# Altium PCB 声光双控电路.PcbDoc
Units mm, origin at the board's own origin, x right, y up, seen from the top; angles counter-clockwise.
Board outline 152.4 x 101.6 mm, 2 copper layers (Top Layer, Bottom Layer); 20 components, 16 nets, 64 pads, 2 vias.
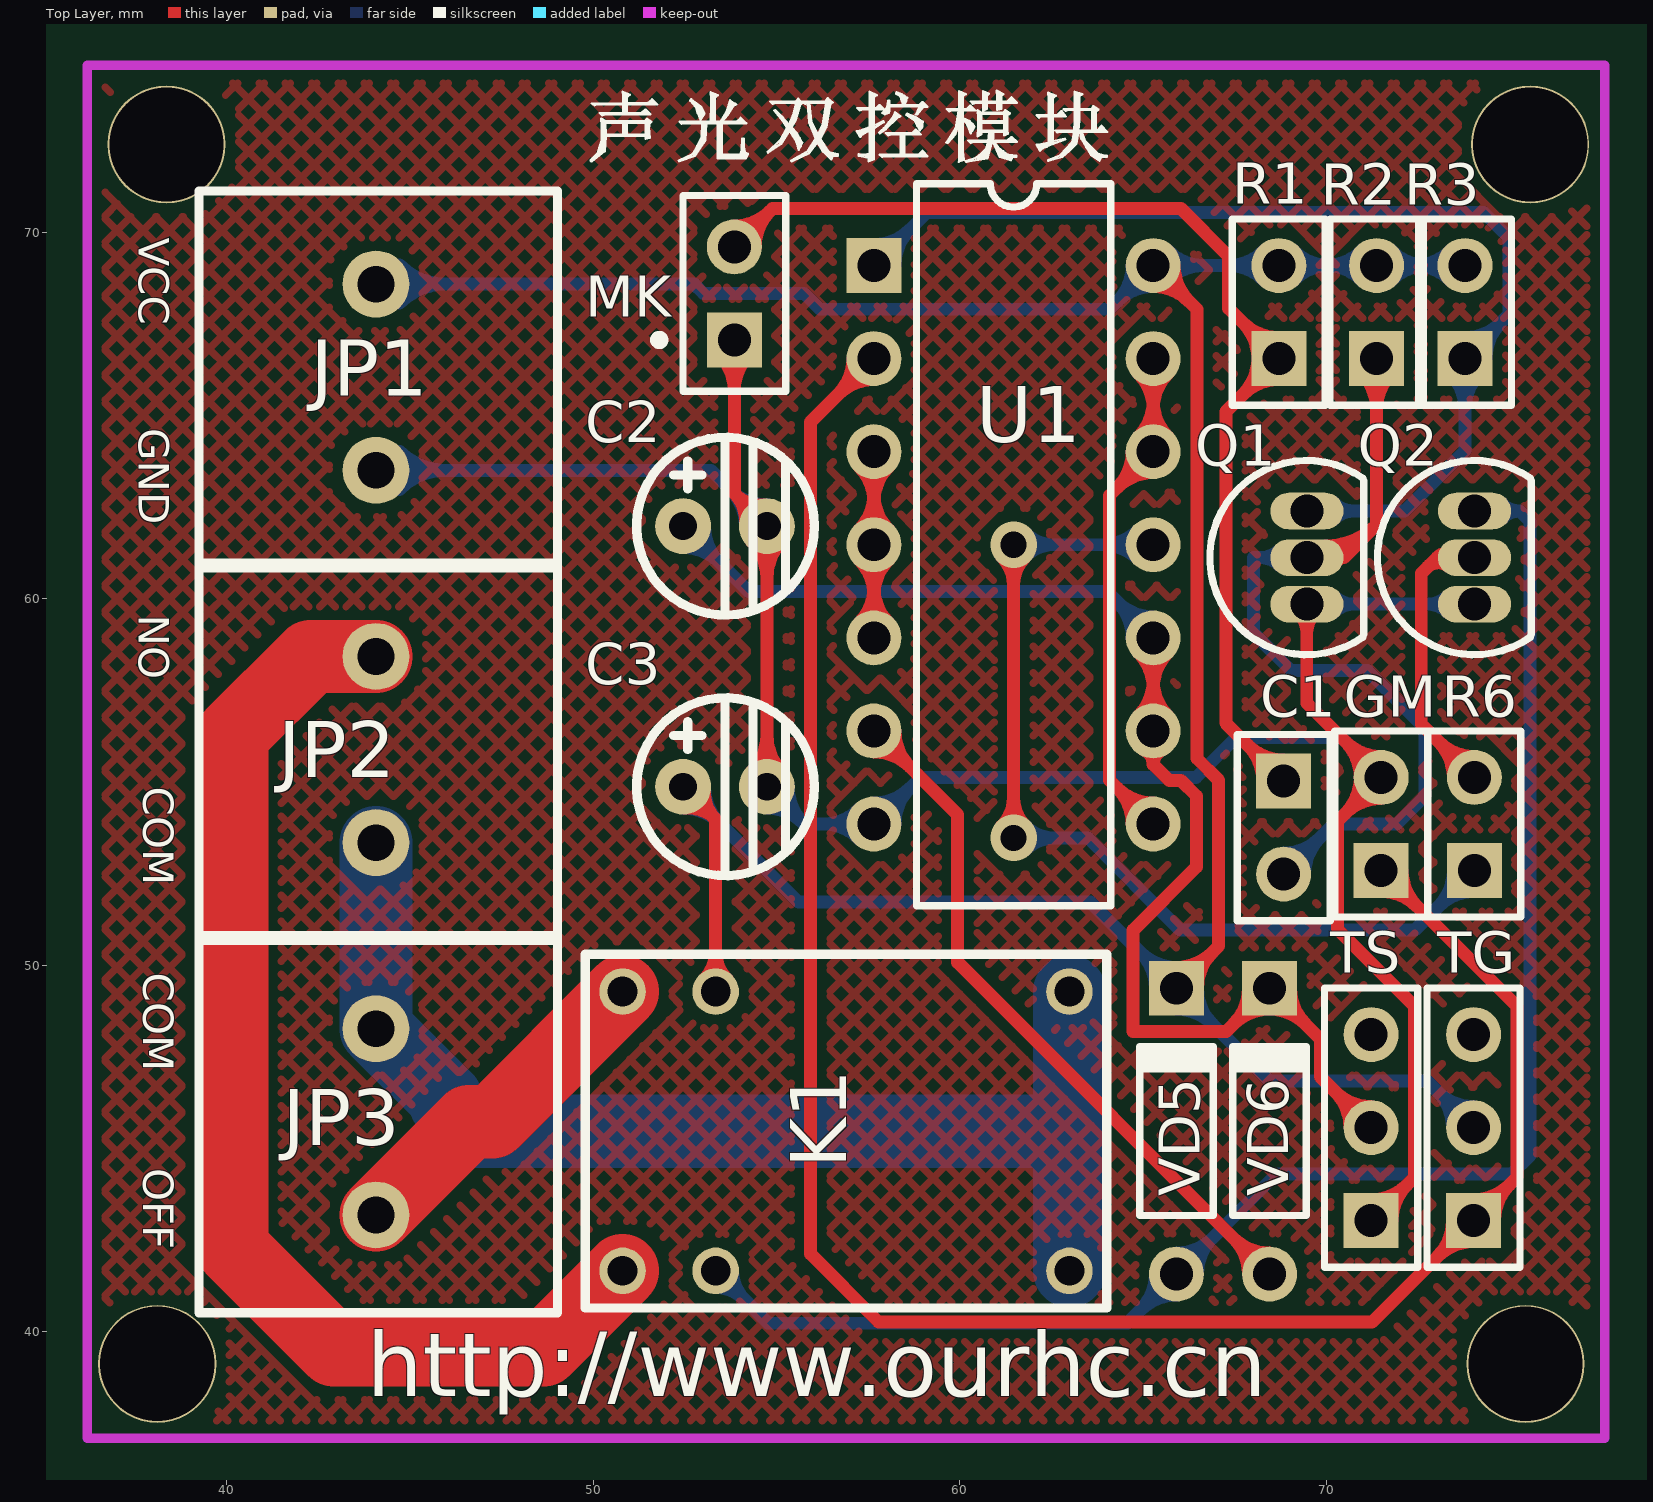
[diagram p0: Top Layer view]
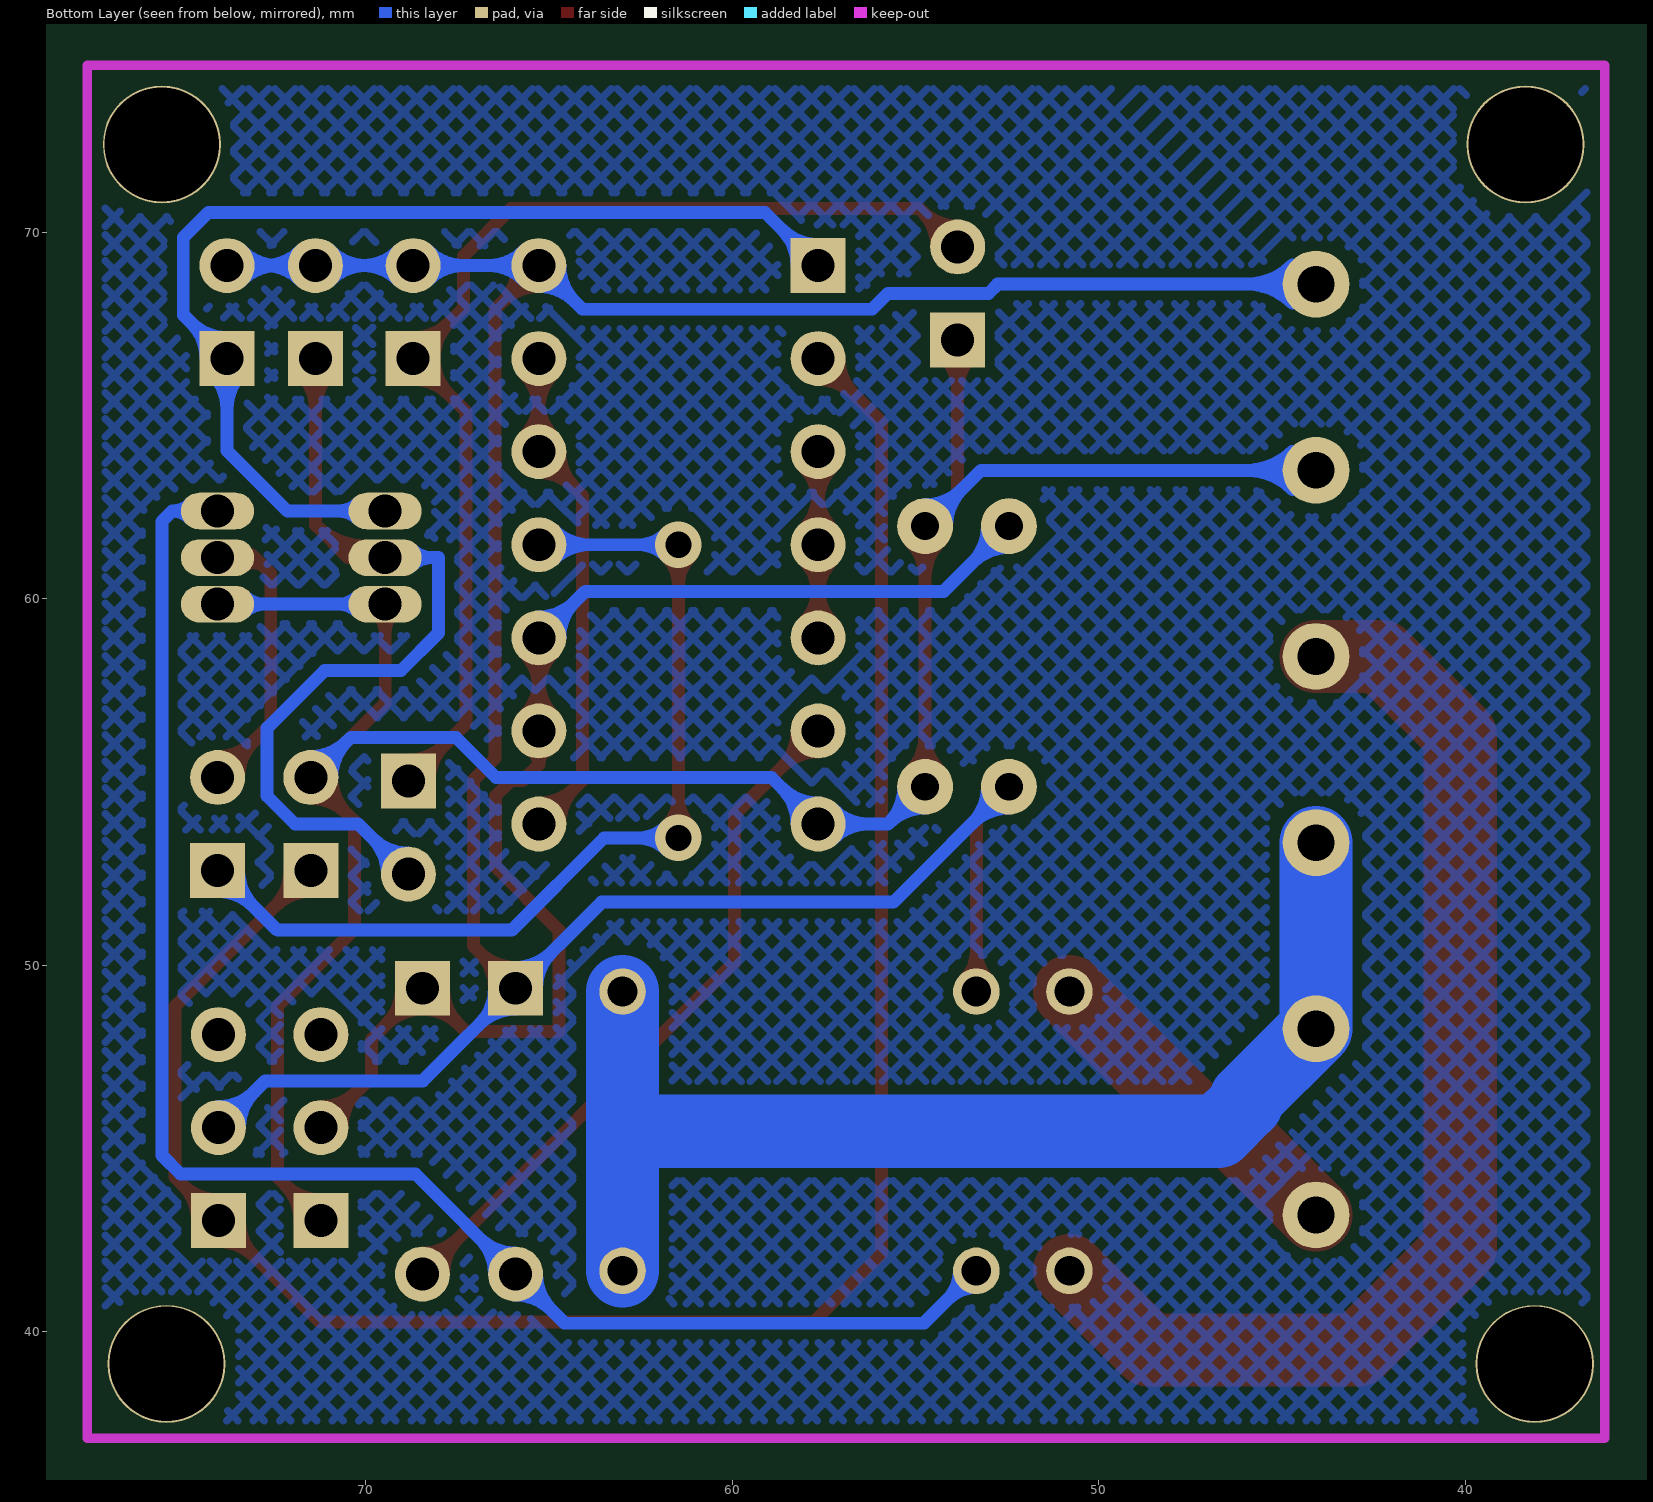
[diagram p1: Bottom Layer view, seen from below]

## Layer stack, top to bottom
Top Layer: signal copper 0.0356
Dielectric: dielectric 0.32, FR-4, Dk 4.8
Bottom Layer: signal copper 0.0356

## Board outline
25.4,25.4 177.8,25.4 177.8,127 25.4,127

## Design rules (kind name [scope] priority, off if disabled: settings)
Clearance [All] p1: gap=0.254
ComponentClearance [All] p1: gap=0.254 collisioncheckmode=3 verticalgap=0.254
PolygonConnect [All] p1: connectstyle=Relief reliefconductorwidth=0.254 reliefentries=4 polygonreliefangle="90 Angle"
RoutingVias [All] p1: holewidth=0.711 width=1.27 viastyle="Through Hole" minholewidth=0.711 minwidth=1.27 maxholewidth=0.711 maxwidth=1.27
SolderMaskExpansion [All] p1: expansion=0.102
TestPointUsage [All] p1: valid=0 allowmultiple=FALSE
Testpoint [All] p1: side=15 testpointundercomponent=TRUE minsize=1.016 maxsize=2.54 preferedsize=1.524 minholesize=0 maxholesize=1.016 preferedholesize=0.813 testpointgrid=0.025 style=1023 order=0-112345678
Width Width_3 [InNet('NetJP3_2')] p1: maxlimit=2 minlimit=2 preferedwidth=2
Width Width_2 [InNet('NetJP2_2')] p2: maxlimit=2 minlimit=2 preferedwidth=2
Width Width_1 [InNet('NetJP2_1')] p3: maxlimit=2 minlimit=2 preferedwidth=2
Width [All] p4: maxlimit=0.354 minlimit=0.354 preferedwidth=0.354
17 further rules are at their usual default settings.

## Components (designator, comment, footprint, x,y, rotation, side; value= is the part's Value field where it differs from the comment)
C1 "Cap" HDR-2 67.691,51.181 r270 top
C2 "22UF" C-DJ-4 54.864,59.436 r0 top
C3 "22UF" C-DJ-4 54.864,52.324 r0 top
GM "光敏电阻" HDR-2 72.649,56.418 r90 top (schematic designator TG)
JP1 "电源接线端" JK128 45.212,68.072 r0 top
JP2 "继电器常闭" JK128 45.212,57.912 r0 top
JP3 "继电器常开" JK128 45.212,47.752 r0 top
K1 "" JDQPF 50.8,41.656 r90 top
MK "CR2Z-113F" PIN2 53.848,67.056 r90 top
Q1 "9013" BCY-W3 69.474,61.117 r0 top
Q2 "9013" BCY-W3 74.046,61.117 r0 top
R1 "22K" HDR-2 69.855,70.388 r90 top
R2 "21M" HDR-2 72.522,70.388 r90 top
R3 "290k" HDR-2 74.935,70.388 r90 top
R6 "100" HDR-2 75.189,56.418 r90 top
TG "" HDR-3 75.184,49.276 r90 top (schematic designator Rp)
TS "" HDR-3 72.39,49.276 r90 top
U1 "SN74LS00N" DIP-14/D19.7 61.468,61.468 r270 top
VD5 "Diode 1N4007" DIO7.8-4.6x2 65.913,45.466 r90 top
VD6 "Diode 1N4007" DIO7.8-4.6x2 68.453,45.466 r90 top

## Footprints (in the part's own frame and the unit in brackets; to place one, negate y for a bottom-side part, rotate by r counter-clockwise, add the part's x,y. Pads: shape width x height; smd on the part's side, far side on the other; paste and mask are expansions set on the pad)
BCY-W3 [mm] "TO, Flat Index; 3 In-Line, Axial Leads; Body Dia. 4.8mm"
  oval 2x1 hole 0.9: 1(0,-1.27) 2(0,0) 3(0,1.27)
  silkscreen extent -2.65,-2.65 1.55,2.65
C-DJ-4 [mil]
  round 60 hole 30: 1(-95,100) 2(-5,100)
  silkscreen extent -145,5 46,195
DIO7.8-4.6x2 [mm] "Diode, Axial; Body 4.6 x 1.9 mm (LxDia. max), Lead Dia. 0.53 mm (max)"
  round 1.5 hole 0.9: 1(-3.9,0)
  rect 1.5x1.5 hole 0.9: 2(3.9,0)
  silkscreen extent -2.3,-1 2.4,1
DIP-14/D19.7 [mm]
  rect 1.5x1.5 hole 0.9: 1(-7.62,-3.81)
  round 1.5 hole 0.9: 2(-5.08,-3.81) 3(-2.54,-3.81) 4(0,-3.81) 5(2.54,-3.81) 6(5.08,-3.81) 7(7.62,-3.81) 8(7.62,3.81) 9(5.08,3.81) 10(2.54,3.81) 11(0,3.81) 12(-2.54,3.81) 13(-5.08,3.81) 14(-7.62,3.81)
  silkscreen extent -9.85,-2.65 9.85,2.65
HDR-2 [mm]
  rect 1.5x1.5 hole 0.9: 1(-3.84,1.148)
  round 1.5 hole 0.9: 2(-1.3,1.148)
  silkscreen extent -5.11,-0.12 -0.03,2.42
HDR-3 [mm]
  rect 1.5x1.5 hole 0.9: 1(-6.253,1.165)
  round 1.5 hole 0.9: 2(-3.713,1.165) 3(-1.173,1.165)
  silkscreen extent -7.52,-0.11 0.1,2.43
JDQPF [mil] "JDQ"
  round 50 hole 32: 1(0,0) 2(300,0) 3(0,-480) 4(300,-480) 5(0,-100) 6(300,-100)
  silkscreen extent -40,-520 340,40
JK128 [mil]
  round 71.81 hole 39.37: 1(-45,20) 2(-45,-180)
  silkscreen extent -235,-285 150,120
PIN2 [mm] "Photosensitive Diode; 2 Leads"
  rect 1.5x1.5 hole 0.9: 1(0,0)
  round 1.5 hole 0.9: 2(2.54,0)
  silkscreen extent -1.4,-1.4 3.94,2.17

## Part data
C1: "Capacitor"
C2 C3: library part "Cap Pol1", "Polarized Capacitor (Radial)"
GM TG TS: library part "Res Adj1", "Variable Resistor"
JP1 JP2 JP3: library part "Header 2H", "Header, 2-Pin, Right Angle"
K1: library part Relay-SPDT, "Single-Pole Dual-Throw Relay"
MK: library part Mic2, "Microphone"
Q1 Q2: library part NPN, "NPN Bipolar Transistor"
R1 R2 R3 R6: library part Res2, "Resistor"
U1: "Quadruple 2-Input Positive-NAND Gate"
VD5 VD6: "1 Amp General Purpose Rectifier"

## Free pads (board coordinates)
  round 3.224 hole 3.12: 0(38.1,39.116) 0(38.354,72.39) 0(75.438,39.116) 0(75.565,72.39)

## Via types
v1: diameter 1.27, hole 0.711, Top Layer to Bottom Layer, 2 vias

## Nets (pads, with @x,y where several pads share a name; then routed paths per layer and width w, separated by ;. In a path a pad name is that pad's centre, name@x,y a point inside that pad or via, vN(x,y) a via of type N, cw(c..) or ccw(c..) an arc to the next point about the centre after c; other vN are vias at no path point)
GND: C2.2 C3.2 GM.2 JP1.2 MK.1 Q1.1 Q2.1 TS.1 U1.7 | length 102.6
  Top Layer w0.354: MK.1@53.443,66.651 cw(c52.465,65.673) 53.848,65.673 cw(c55.231,65.673) MK.1@54.253,66.651 ; MK.1 53.848,62.865 ; C2.2@54.154,62.026 ccw(c53.1,62.117) 53.848,62.865 ; C3.2@54.323,55.278 ccw(c53.325,56.276) 54.737,56.276 ccw(c56.149,56.276) C3.2@55.151,55.278 ; C2.2@54.323,61.562 cw(c53.325,60.564) 54.737,60.564 cw(c56.149,60.564) C2.2@55.151,61.562 ; C2.2@54.687,62.559 cw(c54.596,63.613) 53.848,62.865 ; C3.2 C2.2 53.848,62.865 ; Q1.1@69.246,59.619 cw(c68.706,59.079) 69.469,59.079 ; 69.469,59.055 cw(c70.266,59.055) Q1.1@69.702,59.619 ; Q1.1 69.469,59.847 69.469,57.15 GM.2 70.307,53.924 70.307,50.978 72.415,48.87 72.415,44.213 TS.1 ; TS.1@71.225,43.596 ccw(c71.225,44.979) 72.203,44.001 ccw(c73.181,43.023) TS.1@71.798,43.023 ; GM.2@71.501,54.545 ccw(c71.501,53.162) 70.523,54.14 ccw(c69.545,55.118) 70.928,55.118 ccw(c69.545,55.118) 70.523,56.096 ccw(c71.501,57.074) GM.2@71.501,55.691
  Bottom Layer w0.354: JP1.2 JP1.2@44.196,63.5 ; JP1.2@44.465,63.231 cw(c45.116,62.58) 45.116,63.5 cw(c45.116,64.42) JP1.2@44.465,63.769 ; JP1.2@44.475,63.475 44.704,63.246 44.45,63.246 JP1.2@44.196,63.5 ; JP1.2@44.475,63.5 53.213,63.5 C2.2 ; JP1.2@44.716,62.98 cw(c45.97,61.726) 45.97,63.5 cw(c45.97,65.274) JP1.2@44.716,64.02 ; C2.2@54.152,61.976 ccw(c52.74,61.976) 53.738,62.975 ccw(c54.737,63.973) C2.2@54.737,62.561 ; C3.2@54.737,54.279 cw(c54.737,52.867) 55.736,53.865 cw(c56.734,54.864) C3.2@55.322,54.864 ; C3.2 55.753,53.848 U1.7 58.928,55.118 66.446,55.118 67.539,56.21 70.409,56.21 GM.2 ; U1.7@57.253,53.443 ccw(c56.275,52.465) 56.275,53.848 ccw(c56.275,55.231) U1.7@57.253,54.253 ; U1.7@57.658,54.421 ccw(c57.658,55.804) 58.636,54.826 ccw(c59.614,53.848) U1.7@58.231,53.848 ; Q1.1 Q2.1 ; Q1.1@70.202,59.619 cw(c70.754,59.067) 70.754,59.847 cw(c70.754,60.627) Q1.1@70.202,60.075 ; GM.2@70.928,55.118 ccw(c69.545,55.118) 70.523,56.096 ccw(c71.501,57.074) GM.2@71.501,55.691 ; Q2.1@73.318,59.619 ccw(c72.766,59.067) 72.766,59.847 ccw(c72.766,60.627) Q2.1@73.318,60.075 ; JP1.2@44.196,63.5 44.196,63.627 44.554,63.985 44.704,63.985 44.716,63.996 JP1.2@44.716,64.02 ; JP1.2@44.196,63.5 JP1.2@44.716,64.02
NetC1_1: C1.1 MK.2 R1.1 | length 39.3
  Top Layer w0.354: MK.2 54.889,70.637 66.04,70.637 67.335,69.342 67.335,67.92 R1.1 67.259,65.1 67.259,56.601 C1.1 ; MK.2@53.848,70.169 ccw(c53.848,71.552) 54.826,70.574 ccw(c55.804,69.596) MK.2@54.421,69.596 ; C1.1@68.266,55.021 ccw(c66.883,55.021) 67.861,55.999 ccw(c68.839,56.977) C1.1@68.839,55.594 ; R1.1@68.707,65.975 ccw(c68.707,64.592) 67.729,65.57 ccw(c66.751,66.548) 68.134,66.548 ccw(c66.751,66.548) 67.729,67.526 ccw(c68.707,68.504) R1.1@68.707,67.121
NetC1_2: C1.2 Q1.2 R2.1 | length 31.2
  Top Layer w0.354: Q1.2 70.485,61.117 ; Q1.2@69.974,61.086 ccw(c69.99,62.206) 70.782,61.414 ; Q1.2@69.979,61.44 ccw(c70.007,63.373) 71.374,62.006 ; Q1.2@70.266,60.978 cw(c70.485,60.874) 70.485,61.117 ; Q1.2@70.266,61.256 ccw(c70.485,61.36) 70.485,61.117 ; R2.1@70.969,66.143 cw(c69.991,65.165) 71.374,65.165 cw(c72.757,65.165) R2.1@71.779,66.143 ; R2.1 71.374,62.006 ; 70.485,61.117 71.374,62.006
  Bottom Layer w0.354: Q1.2@68.746,60.889 ccw(c68.194,60.337) 68.194,61.117 ccw(c68.194,61.897) Q1.2@68.746,61.345 ; C1.2 70.206,53.848 71.933,53.848 72.695,54.61 72.695,56.464 71.12,58.039 69.037,58.039 68.021,59.055 68.021,61.117 Q1.2 ; C1.2@68.839,53.054 ccw(c68.839,54.437) 69.817,53.459 ccw(c70.795,52.481) C1.2@69.412,52.481
NetC2_1: C2.1 TS.2 U1.9 U1.10 VD6.2 | length 52.6
  Top Layer w0.354: U1.9@64.873,56.793 ccw(c63.895,57.771) 65.278,57.771 ccw(c66.661,57.771) U1.9@65.683,56.793 ; U1.10@64.873,58.523 cw(c63.895,57.545) 65.278,57.545 cw(c66.661,57.545) U1.10@65.683,58.523 ; U1.10 U1.9 65.278,55.473 ; VD6.2@67.88,49.366 cw(c66.497,49.366) 67.475,48.388 cw(c68.453,47.41) 68.453,48.793 cw(c68.453,47.41) 69.431,48.388 cw(c70.409,49.366) VD6.2@69.026,49.366 ; TS.2@70.652,45.563 ccw(c69.269,45.563) 70.247,46.541 ccw(c71.225,47.519) TS.2@71.225,46.136 ; TS.2 69.85,46.938 69.85,47.969 VD6.2 67.272,48.185 64.732,48.185 64.732,50.953 66.459,52.68 66.459,54.61 66.04,55.029 65.722,55.029 65.278,55.473 ; 65.278,55.474 ccw(c64.835,55.474) 65.028,55.872 cw(c64.835,55.474) 65.278,55.474 ; 65.278,55.474 cw(c65.721,55.474) 65.528,55.872 ccw(c65.721,55.474) 65.278,55.474
  Bottom Layer w0.354: C2.1@52.451,61.391 cw(c52.451,59.979) 53.45,60.977 cw(c54.448,61.976) C2.1@53.036,61.976 ; C2.1 54.229,60.198 64.008,60.198 U1.10 ; U1.10@64.705,58.928 ccw(c63.322,58.928) 64.3,59.906 ccw(c65.278,60.884) U1.10@65.278,59.501
NetGM_1: GM.1 TG.1 U1.2 | length 65.4
  Top Layer w0.354: U1.2@57.085,66.548 cw(c55.702,66.548) 56.68,65.57 cw(c57.658,64.592) U1.2@57.658,65.975 ; U1.2 55.931,64.821 55.931,42.113 57.785,40.259 71.255,40.259 TG.1 75.209,44.213 75.209,48.87 GM.1 ; GM.1@71.501,52.005 cw(c71.501,50.622) 72.479,51.6 cw(c73.457,52.578) GM.1@72.074,52.578 ; TG.1@73.446,43.023 cw(c72.063,43.023) 73.041,42.045 cw(c74.019,41.067) TG.1@74.019,42.45 ; TG.1@74.019,43.596 ccw(c74.019,44.979) 74.997,44.001 ccw(c75.975,43.023) TG.1@74.592,43.023
NetJP2_1: JP2.1 K1.1 | length 31.5
  Top Layer w2: JP2.1 42.291,58.42 40.132,56.261 40.132,42.291 42.926,39.497 48.641,39.497 K1.1
NetJP2_2: JP2.2 JP3.1 K1.3 K1.4 | length 32.9
  Bottom Layer w2: JP2.2 JP3.1 45.974,46.355 45.974,46.228 46.736,45.466 62.992,45.466 ; K1.3 K1.4
NetJP3_2: JP3.2 K1.2 | length 9.3
  Top Layer w2: JP3.2 46.609,45.72 47.244,45.72 K1.2
NetK1_5: K1.5 Q2.3 VD5.1 | length 50.8
  Bottom Layer w0.354: K1.5@53.34,41.198 cw(c53.34,40.092) 54.122,40.874 cw(c54.904,41.656) K1.5@53.798,41.656 ; K1.5 54.771,40.225 64.572,40.225 VD5.1 68.645,44.298 75.057,44.298 75.565,44.806 75.565,62.103 75.281,62.387 ; VD5.1@65.34,41.566 cw(c63.957,41.566) 64.935,40.588 cw(c65.913,39.61) VD5.1@65.913,40.993 ; VD5.1@65.913,42.139 ccw(c65.913,43.522) 66.891,42.544 ccw(c67.869,41.566) VD5.1@66.486,41.566 ; Q2.3 75.281,62.387 ; Q2.3@74.784,62.169 cw(c75.281,61.712) 75.281,62.387 ; Q2.3@74.784,62.605 ccw(c75.281,63.062) 75.281,62.387
NetQ1_3: Q1.3 R3.1 U1.1 | length 37.3
  Bottom Layer w0.354: U1.1 59.106,70.536 74.295,70.536 74.981,69.85 74.981,67.742 R3.1 73.787,64.033 72.141,62.387 Q1.3 ; U1.1@57.658,69.661 ccw(c57.658,71.044) 58.636,70.066 ccw(c59.614,69.088) U1.1@58.231,69.088 ; Q1.3@70.202,62.159 cw(c70.754,61.607) 70.754,62.387 cw(c70.754,63.167) Q1.3@70.202,62.615 ; R3.1@73.382,66.143 cw(c72.404,65.165) 73.787,65.165 cw(c75.17,65.165) R3.1@74.192,66.143 ; R3.1@73.787,67.121 ccw(c73.787,68.504) 74.765,67.526 ccw(c75.743,66.548) R3.1@74.36,66.548
NetQ2_2: Q2.2 R6.2 | length 12.6
  Top Layer w0.354: 72.765,60.857 cw(c73.058,60.563) Q2.2@73.333,60.875 ; 72.821,60.913 cw(c73.415,60.318) Q2.2@73.551,61.148 ; 73.031,61.123 cw(c73.308,60.847) Q2.2@73.566,61.14 ; Q2.2@73.257,60.973 ccw(c73.025,60.858) 73.025,61.117 ; Q2.2@73.257,61.261 cw(c73.025,61.376) 73.025,61.117 ; R6.2@73.468,55.118 ccw(c72.085,55.118) 73.063,56.096 ccw(c74.041,57.074) R6.2@74.041,55.691 ; R6.2 72.593,56.566 72.593,60.685 73.025,61.117 ; Q2.2 73.025,61.117
NetR6_1: R6.1 U1.11 | length 37.4
  Top Layer w0.354: v1@61.144,53.791 ccw(c60.362,54.573) 61.468,54.573 ccw(c62.574,54.573) v1@61.792,53.791 ; v1@61.144,61.144 cw(c60.362,60.362) 61.468,60.362 cw(c62.574,60.362) v1@61.792,61.144 ; v1(61.468,53.467) v1(61.468,61.468)
  Bottom Layer w0.354: v1(61.468,53.467) 63.5,53.467 66.015,50.952 72.415,50.952 R6.1 ; v1(61.468,61.468) U1.11 ; v1@61.792,53.143 cw(c62.574,52.361) 62.574,53.467 cw(c62.574,54.573) v1@61.792,53.791 ; v1@61.792,61.144 cw(c62.574,60.362) 62.574,61.468 cw(c62.574,62.574) v1@61.792,61.792 ; U1.11@64.873,61.063 ccw(c63.895,60.085) 63.895,61.468 ccw(c63.895,62.851) U1.11@64.873,61.873 ; R6.1@73.468,52.578 cw(c72.085,52.578) 73.063,51.6 cw(c74.041,50.622) R6.1@74.041,52.005
NetU1_3: U1.3 U1.4 U1.5 | length 13.8
  Top Layer w0.354: U1.5@57.253,59.333 ccw(c56.275,60.311) 57.658,60.311 ccw(c59.041,60.311) U1.5@58.063,59.333 ; U1.4@57.253,61.063 cw(c56.275,60.085) 57.658,60.085 cw(c59.041,60.085) U1.4@58.063,61.063 ; U1.4@57.253,61.873 ccw(c56.275,62.851) 57.658,62.851 ccw(c59.041,62.851) U1.4@58.063,61.873 ; U1.3@57.253,63.603 cw(c56.275,62.625) 57.658,62.625 cw(c59.041,62.625) U1.3@58.063,63.603 ; U1.5 U1.4 U1.3
NetU1_6: U1.6 VD6.1 | length 23.6
  Top Layer w0.354: U1.6@57.658,55.815 cw(c57.658,54.432) 58.636,55.41 cw(c59.614,56.388) U1.6@58.231,56.388 ; U1.6 59.944,54.102 59.944,50.075 VD6.1 ; VD6.1@67.88,41.566 ccw(c66.497,41.566) 67.475,42.544 ccw(c68.453,43.522) VD6.1@68.453,42.139
NetU1_8: U1.8 U1.12 U1.13 | length 22.4
  Top Layer w0.354: U1.8@64.705,53.848 ccw(c63.322,53.848) 64.3,54.826 ccw(c65.278,55.804) U1.8@65.278,54.421 ; U1.12@64.705,64.008 cw(c63.322,64.008) 64.3,63.03 cw(c65.278,62.052) U1.12@65.278,63.435 ; U1.12@64.873,64.413 ccw(c63.895,65.391) 65.278,65.391 ccw(c66.661,65.391) U1.12@65.683,64.413 ; U1.13@64.873,66.143 cw(c63.895,65.165) 65.278,65.165 cw(c66.661,65.165) U1.13@65.683,66.143 ; U1.8 64.084,55.042 64.084,62.814 U1.12 U1.13
VCC: C3.1 JP1.1 K1.6 R1.2 R2.2 R3.2 TG.2 U1.14 VD5.2 | length 120.8
  Top Layer w0.354: C3.1 53.34,53.975 ; C3.1@52.501,54.281 cw(c52.592,53.227) 53.34,53.975 ; K1.6@53.016,49.6 ccw(c52.234,50.382) 53.34,50.382 ccw(c54.446,50.382) K1.6@53.664,49.6 ; C3.1@53.034,54.814 ccw(c54.088,54.723) 53.34,53.975 ; K1.6 53.34,53.975 ; U1.14@65.278,68.515 cw(c65.278,67.132) 66.256,68.11 cw(c67.234,69.088) U1.14@65.851,69.088 ; U1.14 66.472,67.894 66.472,55.637 67.067,55.042 67.067,50.52 VD5.2 ; VD5.2@65.913,49.939 ccw(c65.913,51.322) 66.891,50.344 ccw(c67.869,49.366) VD5.2@66.486,49.366
  Bottom Layer w0.354: JP1.1 52.756,68.58 53.01,68.326 55.753,68.326 56.185,67.894 64.084,67.894 U1.14 R1.2 R2.2 R3.2 ; JP1.1@44.465,68.311 cw(c45.116,67.66) 45.116,68.58 cw(c45.116,69.5) JP1.1@44.465,68.849 ; JP1.1@44.473,68.58 44.716,68.338 44.716,68.291 44.427,68.58 44.831,68.984 44.831,68.834 45.085,68.58 ; JP1.1@44.716,68.06 cw(c45.97,66.806) 45.97,68.58 cw(c45.97,70.354) JP1.1@44.716,69.1 ; C3.1@52.451,54.279 cw(c52.451,52.867) 53.45,53.865 cw(c54.448,54.864) C3.1@53.036,54.864 ; C3.1 55.599,51.716 63.563,51.716 VD5.2 68.441,46.838 72.744,46.838 TG.2 ; U1.14@64.705,69.088 cw(c63.322,69.088) 64.3,68.11 cw(c65.278,67.132) U1.14@65.278,68.515 ; VD5.2@65.34,49.366 ccw(c63.957,49.366) 64.935,50.344 ccw(c65.913,51.322) VD5.2@65.913,49.939 ; U1.14@65.683,68.683 cw(c66.661,67.705) 66.661,69.088 cw(c66.661,70.471) U1.14@65.683,69.493 ; VD5.2@65.913,48.793 cw(c65.913,47.41) 66.891,48.388 cw(c67.869,49.366) VD5.2@66.486,49.366 ; R1.2@68.302,68.683 ccw(c67.324,67.705) 67.324,69.088 ccw(c67.324,70.471) R1.2@68.302,69.493 ; R1.2@69.112,68.683 cw(c70.09,67.705) 70.09,69.088 cw(c70.09,70.471) R1.2@69.112,69.493 ; R2.2@70.969,68.683 ccw(c69.991,67.705) 69.991,69.088 ccw(c69.991,70.471) R2.2@70.969,69.493 ; R2.2@71.779,68.683 cw(c72.757,67.705) 72.757,69.088 cw(c72.757,70.471) R2.2@71.779,69.493 ; R3.2@73.382,68.683 ccw(c72.404,67.705) 72.404,69.088 ccw(c72.404,70.471) R3.2@73.382,69.493 ; TG.2@73.446,45.563 ccw(c72.063,45.563) 73.041,46.541 ccw(c74.019,47.519) TG.2@74.019,46.136
pads on no net: TG.3 TS.3

## Polygon pours and split planes (outlines as drawn)
no net on Top Layer (hatched 45Degree grid 0.508 track 0.203): 36.682,74.168 77.322,74.168 77.322,37.465 36.682,37.465
no net on Bottom Layer (hatched 45Degree grid 0.508 track 0.203): 36.788,73.914 77.174,73.914 77.174,37.465 36.661,37.465 36.661,73.914

## Keep-outs
Keep-Out Layer:
  lines w0.254: 36.195,37.084 36.195,74.549 77.597,74.549 77.597,37.084 36.195,37.084

## Silkscreen, mask and mechanical layers (free items; w line width, h text height)
Top Overlay:
  drawing of 1018 lines, arcs and shapes, not listed
  text "VCC" at 37.592,69.85 h0.84 r270
  text "GND" at 37.592,64.643 h0.84 r270
  text "NO" at 37.592,59.563 h0.84 r270
  text "COM" at 37.719,54.864 h0.84 r270
  text "COM" at 37.719,49.784 h0.84 r270
  text "OFF" at 37.719,44.45 h0.84 r270
  text "http://www.ourhc.cn" at 43.815,38.227 h1.76